# Altium PCB xl6009_kian_v1_TEST1.PcbDoc
Units mm, origin at the board's own origin, x right, y up, seen from the top; angles counter-clockwise.
Board outline 49.02 x 80.01 mm, 2 copper layers (Top Layer, Bottom Layer); 32 components, 16 nets, 98 pads, 0 vias.
Unrouted connection lines stored in the file: 1.
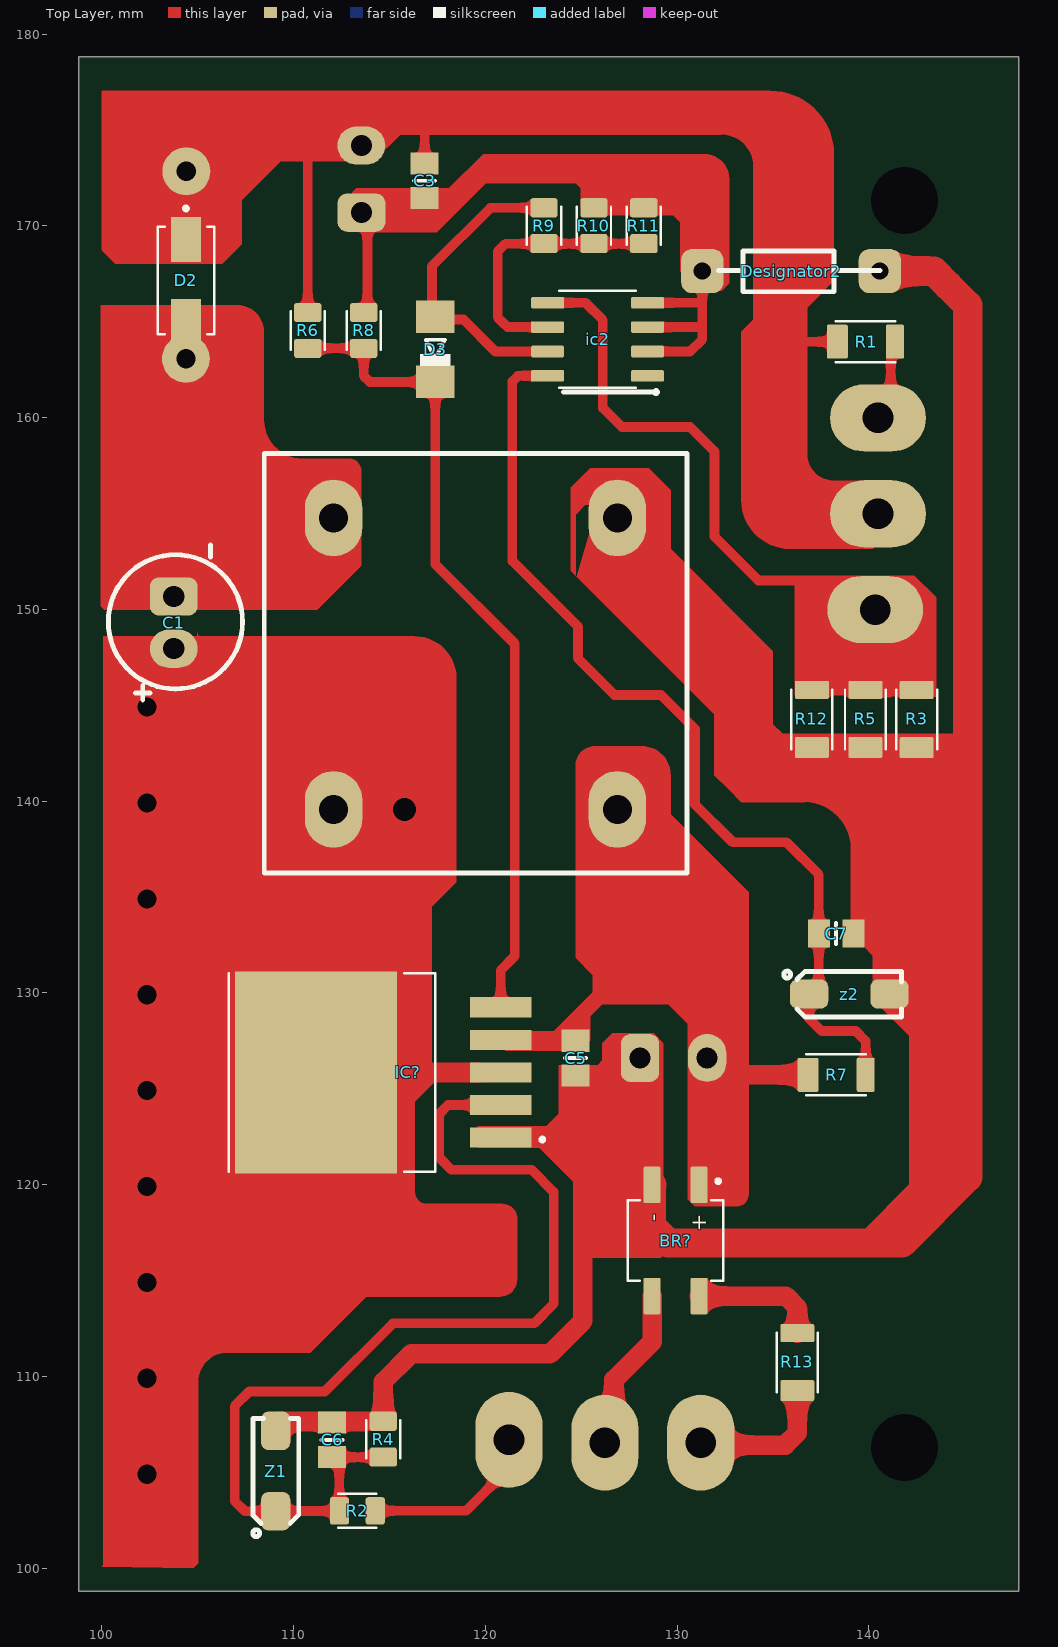
[diagram p0: Top Layer view]
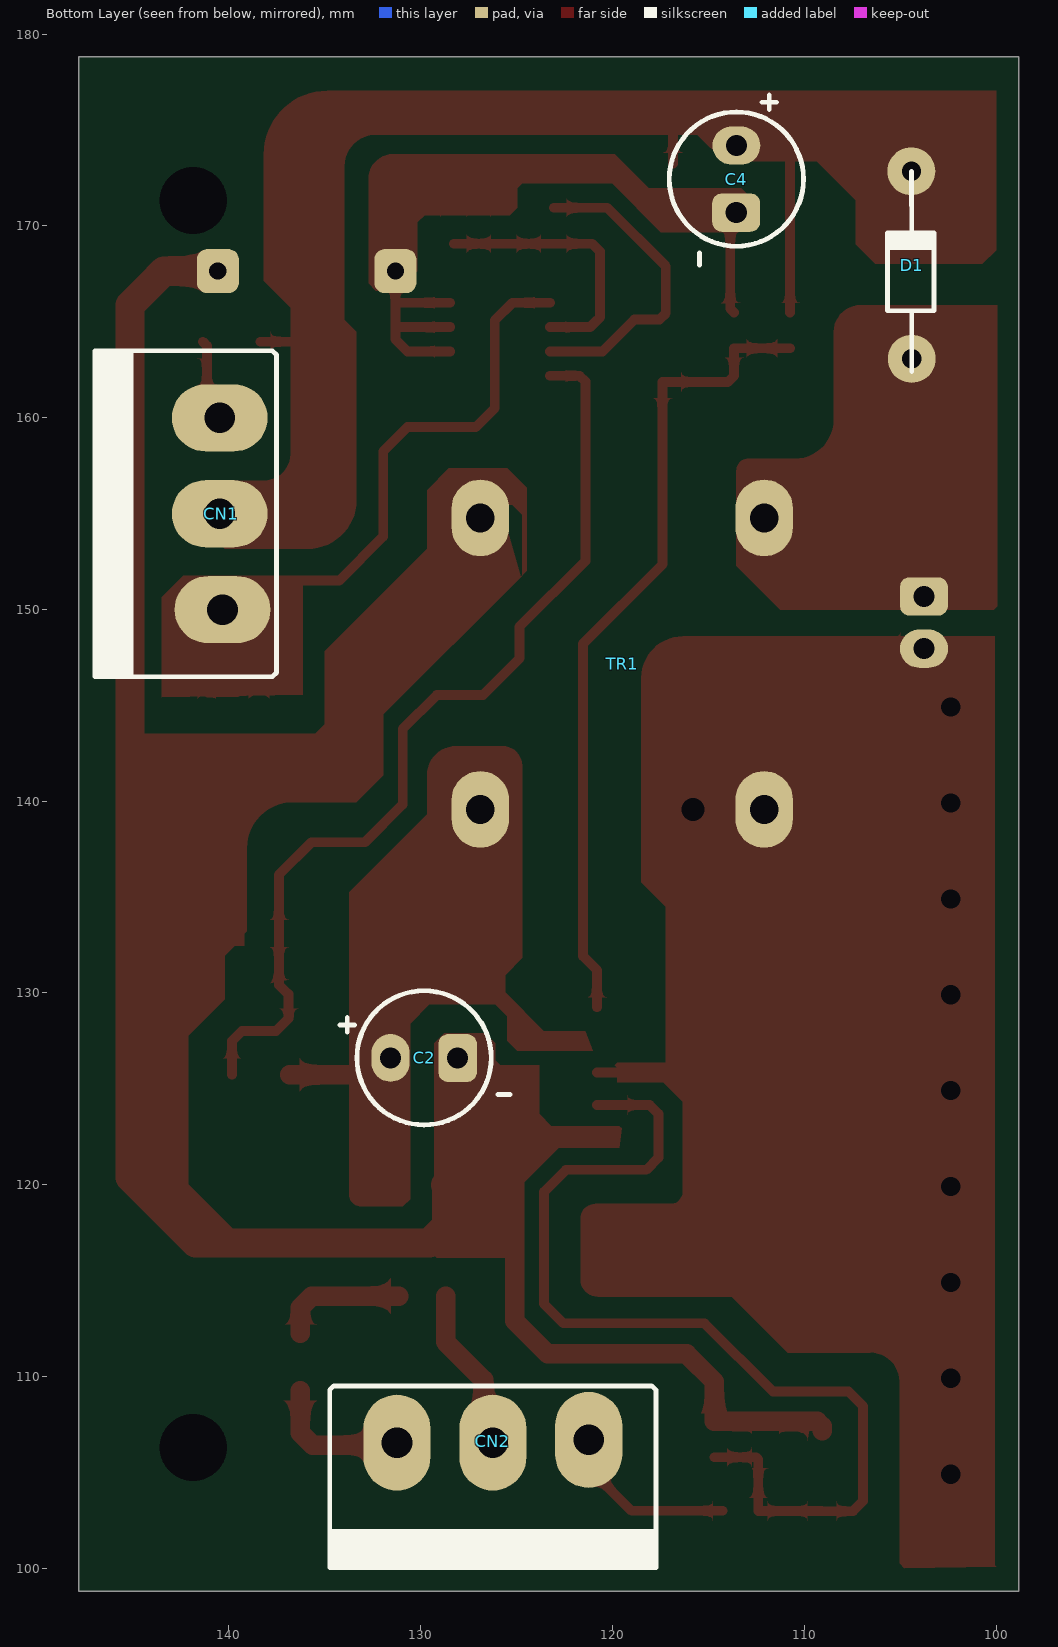
[diagram p1: Bottom Layer view, seen from below]
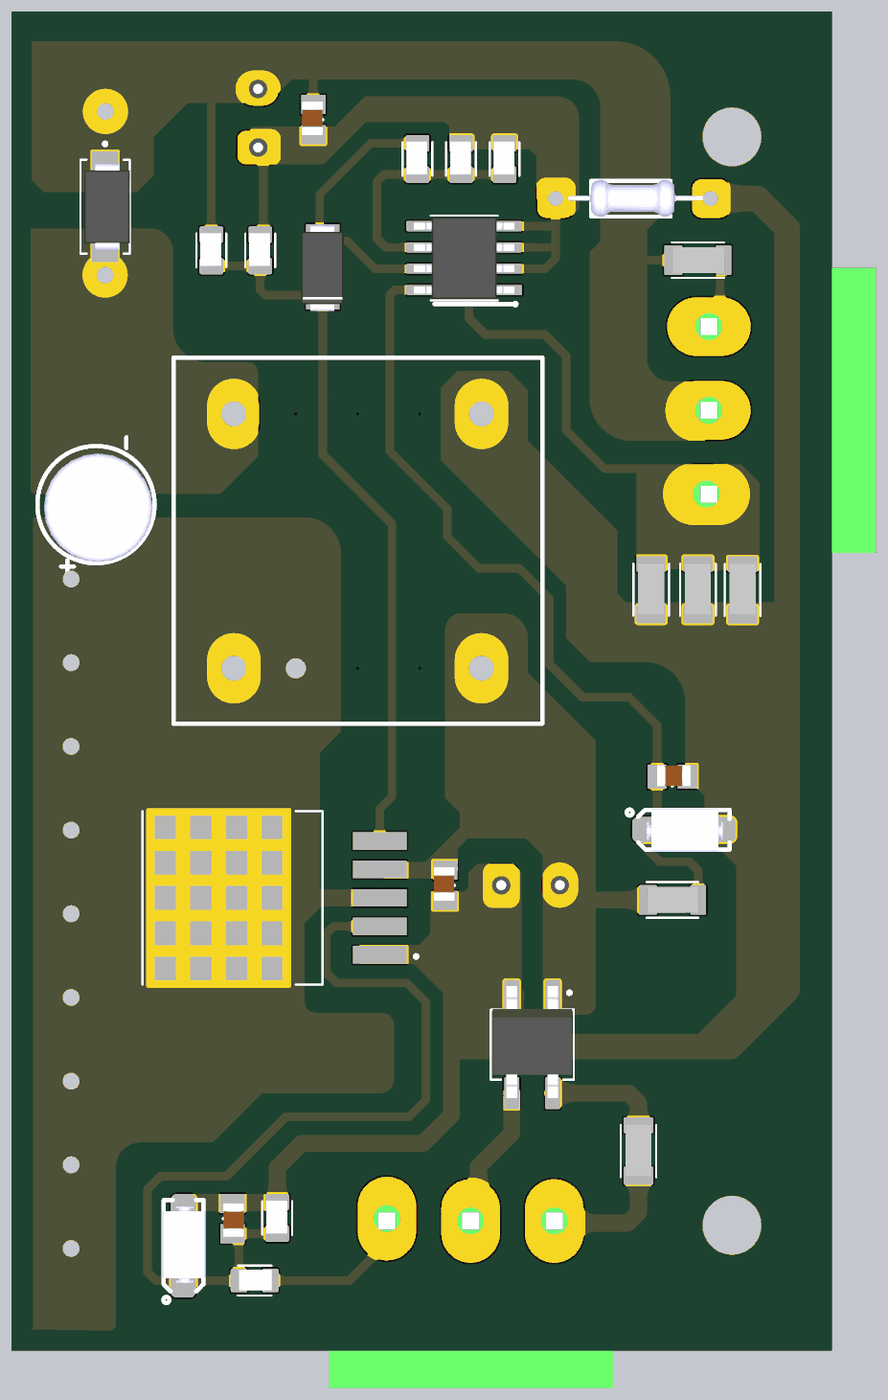
[diagram p2: 3D render of the assembled board from above, using the file's embedded part models]
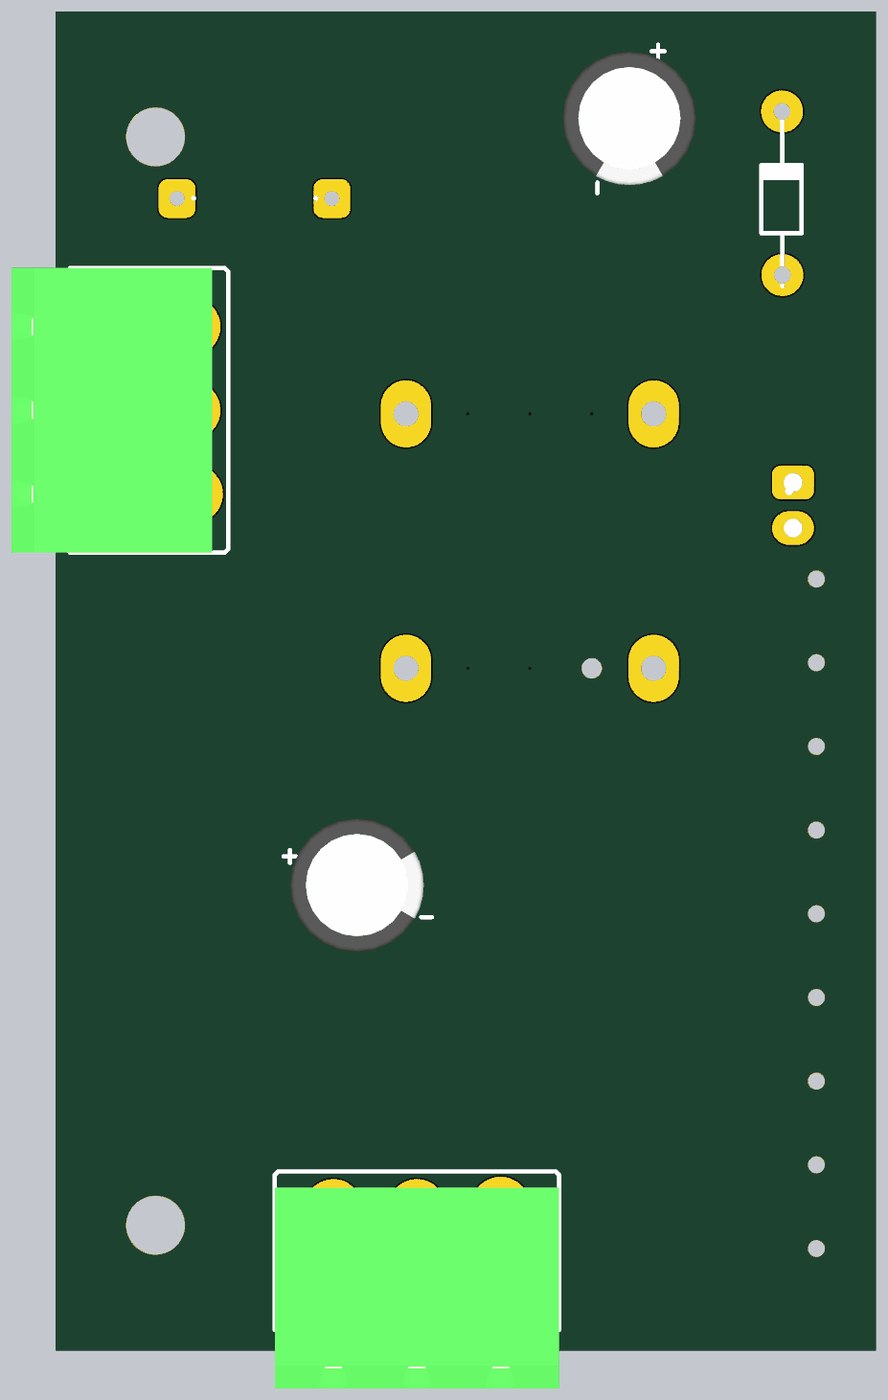
[diagram p3: 3D render of the assembled board from below, using the file's embedded part models]

## Layer stack, top to bottom
Top Solder: solder mask 0.0102, Solder Resist, Dk 3.5
Top Layer: signal copper 0.0356
Dielectric 1: dielectric 0.32, FR-4, Dk 4.8
Bottom Layer: signal copper 0.0356
Bottom Solder: solder mask 0.0102, Solder Resist, Dk 3.5

## Board outline
98.806,98.806 98.806,178.816 147.828,178.816 147.828,98.806

## Design rules (kind name [scope] priority, off if disabled: settings)
Clearance "Stitching GND" [IsStitchingVia and InNet('GND') vs (IsVia and (Not IsStitchingVia)) Or IsPad] p1: gap=0.127 ignorepadtopadclearanceinfootprint=FALSE
Clearance [All] p2: gap=0.432 ignorepadtopadclearanceinfootprint=FALSE
PolygonConnect [All] p1: connectstyle=Relief reliefconductorwidth=0.254 reliefentries=4 polygonreliefangle="90 Angle" airgapwidth=0.254
RoutingVias [All] p1: holewidth=0.711 width=1.27 viastyle="Through Hole" minholewidth=0.711 minwidth=1.27 maxholewidth=0.711 maxwidth=1.27
SolderMaskExpansion [All] p1: expansion=0.102 istentingtop=FALSE
Width [All] p1: maxlimit=5 minlimit=0.254 preferedwidth=0.254 minimp=50.000000 maximp=50.000000 favimp=50.000000
30 further rules are at their usual default settings.

## Classes and differential pairs
net class POWER_OUT: +LED_G +LED_OUT -LED_OUT
net class HV: AC1 AC2 SIGNAL-24V
component class U_xl6009_kian_v1_SWITCHING: BR? C1 C2 C3 C4 C5 C6 C7 D1 D2 D3 ic2 IC? R1 R2 R3 R4 R5 R6 R7 R8 R9 R10 R11 TR1 Z1 z2
component class U_xl6009_kian_v1_CONECTOR: CN1 CN2

## Components (designator, comment, footprint, x,y, rotation, side; value= is the part's Value field where it differs from the comment)
BR? "MB6S" MB6S/SMD 129.286,117.094 r90 top
C1 "22uF-50V" cap/330u/16v 103.759,150.675 r270 top
C2 "330uF-50V" CAP-EL-P3.5MM 128.072,126.619 r0 bottom
C3 "1uF" CAP-0805 116.862,173.275 r270 top
C4 "330uF-50V" CAP-EL-P3.5MM 113.538,170.688 r90 bottom
C5 "1uF" CAP-0805 124.736,127.533 r270 top
C6 "100nF" CAP-0805 111.992,105.769 r90 top
C7 "100nF" CAP-0805 139.217,133.074 r180 top
CN1 "LED_OUT" CONECTOR/FONIX/3PIN 140.479,159.987 r270 bottom
CN2 "INPUT-24-S" CONECTOR/FONIX/3PIN 131.238,106.553 r180 bottom
D1 "1N5822" DIOD/1N4007/DIP 104.394,172.868 r270 bottom
D2 "1N5822" DIOD/1N4007/SMD 104.394,169.31 r270 top
D3 "4148" mini_melf 117.348,163.703 r90 top
Designator2 "Comment" RES/0.25W 131.318,167.64 r0 top
ic2 "LM358" SOP-8 125.476,164.211 r180 top
IC? "XL6009" TO-263-5L 114.681,125.857 r180 top
R1 "33R" RES/1206 139.827,163.83 r0 top
R2 "10K" RES/0805 114.378,103.93 r180 top
R3 "0.2R" RES/1206 142.625,144.26 r90 top
R4 "100K" RES/0805 113.748,107.782 r270 top
R5 "0.2R" RES/1206 139.954,144.272 r90 top
R6 "10K" RES/0805 109.811,165.594 r270 top
R7 "2.2k" RES/1206 138.303,125.603 r0 top
R8 "2.2K" RES/0805 112.732,165.594 r270 top
R9 "10K" RES/0805 122.13,171.055 r270 top
R10 "2.2k" RES/0805 124.733,171.055 r270 top
R11 "" RES/0805 127.337,171.055 r270 top
R12 "0.2R" RES/1206 137.16,144.272 r90 top (schematic designator R3)
R13 "0.2R" RES/1206 136.402,110.732 r90 top (schematic designator R3)
TR1 "EE20" EE20- 126.889,139.576 r180 bottom
Z1 "4.7V" DIOD/RS1J 108.966,105.156 r90 top
z2 "12v" DIOD/RS1J 139.065,130.048 r0 top

## Footprints (in the part's own frame and the unit in brackets; to place one, negate y for a bottom-side part, rotate by r counter-clockwise, add the part's x,y. Pads: shape width x height; smd on the part's side, far side on the other; paste and mask are expansions set on the pad)
CAP-0805 [mm]
  rect 1.15x1.45 smd: 1(0.025,-0.022) 2(1.825,-0.022)
  silkscreen extent 0.93,-0.57 0.93,0.53, body extent -0.17,-0.71 1.84,0.54, height 0.94
CAP-EL-P3.5MM [mm]
  oval 2x2.5 hole 1.1: +(3.5,0)
  rrect50% 2x2.5 hole 1.1: -(0,0.01)
  silkscreen extent -2.73,-3.5 6.13,3.5, body extent -2.25,-4 5.75,4, height 11.5
cap/330u/16v [mm]
  oval 2x2.5 hole 1.1: +(2.72,0)
  rrect50% 2x2.5 hole 1.1: -(0,0)
  silkscreen extent -2.7,-3.41 5.4,3.59, body extent -1.74,-3.02 4.76,3.48, height 11
CONECTOR/FONIX/3PIN [mm]
  oval 3.5x5 hole 1.6: 1(0,0) 2(5,0) 3(10,0.144)
  silkscreen extent -3.5,-6.5 13.5,2.96, body extent -3.5,-10 13.5,2, height 8.8
DIOD/1N4007/DIP [mm]
  round 2.5 hole 1: A(9.8,0) K(0.025,-0.021)
  silkscreen extent 0.02,-1.26 10.46,1.15
DIOD/1N4007/SMD [mm]
  rect 2.33x1.56 smd: A(4.299,0) K(0.019,0)
  silkscreen extent -1.7,-1.48 4.96,1.48, body extent -0.44,-1.24 4.76,1.49, height 2.6
DIOD/RS1J [mm]
  rrect50% 2x1.524 smd: A(2.013,-0.106) K(-2.178,-0.106)
  silkscreen extent -3.5,-1.31 2.65,1.09, body extent -2.32,-1.44 2.28,1.16, height 2.1
EE20- [mm]
  oval 3x4 hole 1.5: 1(-0.001,-0.003) 5(14.799,-0.003) 6(-0.001,15.197) 10(14.799,15.197)
  round 0 all layers, no hole: 2(3.699,-0.003) 3(7.399,-0.003) 7(3.699,15.197) 8(7.399,15.197) 9(11.099,15.197)
  round 0 hole 1.2: 4(11.099,-0.003)
MB6S/SMD [mm]
  rrect23% 1.91x0.91 smd: +(2.9,-1.86) -(2.9,0.59) F(-2.9,0.59) N(-2.9,-1.86)
  silkscreen extent -2.1,-3.12 3.2,1.85, body extent -3.19,-3 3.51,1.72, height 2.9
mini_melf [mm]
  rect 1.7x2 smd: A(1.557,-0.049) K(-1.843,-0.049)
  silkscreen extent -1.01,-0.84 0.36,0.74, body extent -2.79,-1.31 2.35,1.25, height 2.5
RES/0.25W [mm]
  rrect50% 2.2x2.3 hole 0.9: 1(0,0) 2(9.258,0)
  silkscreen extent 0.85,-1.07 9.26,1.05, body extent 0.81,-1.08 8.41,1.12, height 2.1
RES/0805 [mm]
  rrect25% 1x1.42 smd: 1(0.113,0.933) 2(1.983,0.933)
  silkscreen extent 0.05,0.04 2.05,1.82, body extent 0,0.28 2,1.53, height 0.6
RES/1206 [mm]
  rrect14% 1.09x1.77 smd: 1(-1.469,0.131)
  rrect14% 0.94x1.77 smd: 2(1.536,0.131)
  silkscreen extent -1.55,-0.93 1.55,1.2, body extent -1.51,-0.64 1.59,0.91, height 0.55
SOP-8 [mm]
  rrect25% 1.71x0.61 smd: 1(-2.986,2.032) 2(-2.986,0.762) 3(-2.986,-0.508) 4(-2.986,-1.778) 5(2.224,-1.778) 6(2.224,-0.508) 7(2.224,0.762) 8(2.224,2.032)
  silkscreen extent -3.53,-2.4 1.62,2.98, body extent -3.38,-2.32 2.62,2.58, height 1.75
TO-263-5L [mm]
  rect 3.21x1.05 smd: 1(-6.13,3.4) 2(-6.13,1.7) 3(-6.13,0) 4(-6.13,-1.7) 5(-6.13,-3.4)
  rect 8.46x10.53 smd paste-6: 6(3.5,0)
  silkscreen extent -8.4,-5.18 8.05,5.18

## Part data
BR?: library part "BRIDGE RECTIFIERS/SMD"
C1 C2 C4: library part cap-electrolit
C3 C5 C6 C7: library part cap_smd
CN1 CN2: library part CONECTOR/FONIX/3PIN
D1 D2 D3: library part DIOD/RECTIFIERS
R1 R2 R3 R4 R5 R6 R7 R8 R9 R10 R11 R12 R13: library part RES/SMD
TR1: library part TRANS_NORMAL
Z1 z2: library part zener-0.5w

## Free pads (board coordinates)
  round 1.524 hole 3.5: 13(141.859,106.299) 13(141.859,171.323)
  oval 0x1.524 hole 1: 14(102.362,144.907) 34(102.362,144.907) 35(102.362,139.907) 36(102.362,134.907) 37(102.362,129.907) 38(102.362,124.907) 39(102.362,119.907) 40(102.362,114.907) 41(102.362,109.907) 42(102.362,104.907)

## Nets (pads, with @x,y where several pads share a name; then routed paths per layer and width w, separated by ;. In a path a pad name is that pad's centre, name@x,y a point inside that pad or via, vN(x,y) a via of type N, cw(c..) or ccw(c..) an arc to the next point about the centre after c; other vN are vias at no path point)
+12: C7.2 ic2.8 R7.2 z2.K | length 50.2
  Top Layer w0.508: ic2.8 121.71,162.179 121.412,161.881 121.412,152.527 124.841,149.098 124.841,147.447 126.746,145.542 129.159,145.542 130.937,143.764 130.937,139.827 132.905,137.858 135.7,137.858 137.392,136.166 C7.2 137.392,130.419 z2.K@136.916,129.942 ; z2.K 136.887,128.67 137.541,128.016 139.319,128.016 139.839,127.496 R7.2
+24: BR?.+ C2.+ C5.1 IC?.4 R7.1 TR1.1 | length 5.6
  Top Layer w1.016: C2.+ 131.588,126.619 132.474,125.734 R7.1
+LED_G: CN1.1 R1.2 | length 4.3
  Top Layer w0.508: CN1.1 141.147,160.655 141.147,163.745 R1.2
+LED_OUT: C3.1 C4.+ CN1.2 D1.K D2.K R1.1 R6.1 | length 14.6
  Top Layer w0.508: R6.1 110.744,174.625 110.998,174.879 ; 116.586,175.641 116.84,175.387 C3.1 ; 135.763,163.83 135.894,163.961 R1.1
-LED_OUT: CN1.3 ic2.5 R3.2 R5.2 R12.2 | length 40.9
  Top Layer w0.508: ic2.5 125.222,165.989 126.133,165.078 126.133,160.506 127.127,159.512 130.683,159.512 131.953,158.242 131.953,153.797 134.239,151.511 137.251,151.511 138.775,149.987 CN1.3 140.335,146.024 140.119,145.808 R5.2 ; R12.2 137.035,145.802 R5.2@139.7,145.802 ; R5.2@139.844,145.946 R5.2@139.7,145.802 ; 141.097,145.669 141.091,145.675 139.573,145.675 R5.2@139.7,145.802 ; R3.2 142.488,145.802 R5.2@139.7,145.802
AC1: CN2.1 R13.1 | length 7.6
  Top Layer w1.016: CN2.1 131.365,106.426 135.636,106.426 136.271,107.061 R13.1
AC2: BR?.F CN2.2 | length 8.7
  Top Layer w1.016: CN2.2 126.713,107.028 126.713,109.822 128.696,111.805 BR?.F
EN: C6.1 IC?.2 R2.2 R4.2 Z1.K | length 52.7
  Top Layer w0.508: R4.2 114.678,105.796 112.522,105.796 112.395,105.669 R2.2 112.385,102.987 109.081,102.987 Z1.K 107.461,102.978 106.934,103.505 106.934,108.458 107.696,109.22 111.633,109.22 115.189,112.776 122.555,112.776 123.571,113.792 123.571,119.634 122.428,120.777 118.237,120.777 117.602,121.412 117.602,123.698 118.061,124.157 IC?.2
FB: D3.K IC?.5 R6.2 R8.2 | length 42.8
  Top Layer w0.508: R6.2 R8.2 113.665,162.179 113.984,161.86 D3.K 117.397,152.351 121.539,148.209 121.539,131.919 120.811,131.191 IC?.5
FUZE: BR?.N R13.2 | length 6.7
  Top Layer w1.016: BR?.N 135.676,114.194 136.271,113.599 R13.2
GND: BR?.- C2.- C3.2 C4.- C5.2 C6.2 C7.1 Designator2.1 Designator2.2 ic2.2 ic2.3 ic2.4 IC?.1 R3.1 R4.1 R5.1 R8.1 R10.1 R11.1 R12.1 TR1.6 Z1.A z2.A | length 159.4
  Top Layer w0.508: C4.- 116.586,170.688 C3.2@117.348,171.45 ; R8.1 113.855,165.671 113.855,170.37 C4.-@114.046,170.561 ; C3.2 C3.2@117.348,171.45 ; R10.1 R11.1@128.135,170.942 ; ic2.2 130.683,163.449 131.318,164.084 131.318,164.846 ; ic2.3 131.191,164.719 131.318,164.846 ; ic2.4 131.191,165.989 131.318,166.116 ; Designator2.1@131.064,167.64 131.064,170.561 130.683,170.942 R11.1 R11.1@128.135,170.942 ; Designator2.1 131.318,166.116 ; C3.2@117.348,171.45 118.491,171.45 120.015,172.974 127.127,172.974 127.889,172.212 127.889,171.188 R11.1@128.135,170.942 ; 131.318,164.846 131.318,166.116
  Top Layer w1.016: Z1.A 109.072,107.407 109.334,107.669 R4.1 114.681,109.728 116.136,111.183 123.375,111.183 125.095,112.903 125.095,122.203 124.841,122.457 ; IC?.1 124.841,122.457 ; C2.- 127.889,126.426 127.889,124.333 128.696,123.526 128.696,122.555 ; BR?.- 128.696,122.555 ; 124.841,122.457 128.598,122.457 128.696,122.555
  Top Layer w1.524: BR?.- 128.651,119.949 128.651,117.86 129.544,116.967 141.732,116.967 145.161,120.396 145.161,130.048 ; Designator2.2 143.383,167.64 144.144,166.879 145.161,165.862 145.161,130.048 ; 145.055,129.942 145.161,130.048
NetC1_-: C1.- D1.A D2.A TR1.10 | length 22.1
  Top Layer w1.524: C1.-@103.886,151.003 104.136,151.003 104.394,151.261 104.394,154.94 ; D2.A D1.A 104.394,154.94 ; TR1.10 111.923,154.94 104.394,154.94
NetD3_A: D3.A ic2.7 R9.1 | length 16.4
  Top Layer w0.508: R9.1 120.269,170.942 117.221,167.894 117.221,165.436 117.546,165.111 118.861,165.111 120.523,163.449 ic2.7
Netic2_6: ic2.6 R9.2 R10.2 R11.2 | length 14
  Top Layer w0.508: ic2.6 121.158,164.719 120.905,164.972 120.65,165.227 120.65,168.656 121.066,169.072 R9.2 R10.2 R11.2
SIGNAL-24V: CN2.3 R2.1 | length 9.4
  Top Layer w0.508: R2.1 118.999,102.997 121.238,105.236 CN2.3
SW: C1.+ IC?.3 IC?.6 pad.14 pad.34 pad.35 pad.36 pad.37 pad.38 pad.39 pad.40 pad.41 pad.42 TR1.4 TR1.5 | length 40.3
  Top Layer w0.508: C1.+ C1.+@103.886,148.082 ; C1.+@103.886,148.283 110.289,148.283 112.09,146.482 TR1.5 ; TR1.5@112.488,139.573 112.615,139.7 112.615,138.869 111.181,137.435 IC?.6 IC?.3
pads on no net: ic2.1 TR1.2 TR1.3 TR1.7 TR1.8 TR1.9

## Other copper
Top Layer:
  region net GND: 113.538,169.672 117.475,169.672 120.015,172.212 124.714,172.212 124.968,171.958 124.968,170.942 125.349,170.561 129.794,170.561 130.175,170.18 130.175,167.64 131.191,166.624 132.334,166.624 132.715,167.005 132.715,172.466 ccw(c131.445,172.466) 131.445,173.736 119.888,173.736 118.11,171.958 113.284,171.958 112.903,171.577
  region net -LED_OUT: 136.144,145.542 136.144,151.384 136.525,151.765 142.367,151.765 143.51,150.622 143.51,145.415
  region net GND: 139.7,117.602 142.113,120.015 142.113,127.762 140.208,129.667 140.208,131.953 139.7,132.461 139.192,132.461 139.192,133.096 139.065,133.223 139.065,137.541 ccw(c136.652,137.541) 136.652,139.954 133.35,139.954 132.715,140.589 133.223,141.097 133.223,142.367 144.653,142.367 145.542,141.478 145.542,120.65 141.851,116.959 139.683,117.113 cw(c139.7,117.357)
  region net NetC1_-: 113.538,152.273 111.252,149.987 100.127,149.987 99.949,150.165 99.949,165.862 107.061,165.862 cw(c107.061,164.465) 108.458,164.465 108.458,159.893 ccw(c110.49,159.893) 110.49,157.861 112.903,157.861 cw(c112.903,157.226) 113.538,157.226 113.538,154.813
  region net +LED_OUT: 100.711,168.021 100,168.732 100,177.038 134.874,177.038 cw(c134.874,173.736) 138.176,173.736 138.176,167.132 136.779,165.735 136.779,158.115 ccw(c138.176,158.115) 138.176,156.718 141.224,156.718 141.986,155.956 141.732,155.702 141.732,154.305 141.351,154.305 140.208,153.162 135.89,153.162 cw(c135.89,155.702) 133.35,155.702 133.35,164.465 133.985,165.1 133.985,173.101 ccw(c132.334,173.101) 132.334,174.752 115.57,174.752 114.173,173.355 109.347,173.355 107.315,171.323 107.315,169.037 106.299,168.021
  region net +24: 121.031,127 124.968,127 125.476,127.508 125.476,128.778 126.111,129.413 129.54,129.413 130.556,128.397 130.556,119.253 130.937,118.872 133.096,118.872 ccw(c133.096,119.507) 133.731,119.507 133.731,135.255 129.667,139.319 129.667,141.351 ccw(c128.143,141.351) 128.143,142.875 125.73,142.875 ccw(c125.73,141.859) 124.714,141.859 124.714,131.826 125.603,130.937 125.603,130.048 123.571,128.016 121.412,128.016
  region net GND: 119.507,122.936 119.634,123.063 123.19,123.063 123.825,123.698 123.825,126.238 125.857,126.238 126.111,126.492 126.111,127.381 126.619,127.889 128.778,127.889 129.286,127.381 129.286,116.332 129.159,116.205 125.095,116.205 124.714,116.586 124.714,120.015 122.809,121.92 119.634,121.92
  region net SW: 104.775,100 105.029,100.254 105.029,109.728 cw(c106.553,109.728) 106.553,111.252 110.871,111.252 113.792,114.173 120.777,114.173 ccw(c120.777,115.062) 121.666,115.062 121.666,118.237 ccw(c120.904,118.237) 120.904,118.999 116.967,118.999 cw(c116.967,119.634) 116.332,119.634 116.332,124.333 117.348,125.349 119.761,125.349 119.761,126.111 119.888,126.238 119.761,126.365 118.618,126.365 117.221,126.365 117.221,134.493 118.491,135.763 118.491,146.431 ccw(c116.332,146.431) 116.332,148.59 101.727,148.59 100.076,148.59 100.076,146.939 100.076,100.152 100,100.076
  region net GND: 125.857,155.448 125.222,155.448 124.714,154.94 124.714,151.765 131.953,144.526 131.953,141.351 132.715,140.589 144.526,140.589 145.161,139.954 145.796,140.589 145.796,142.494 144.78,143.51 135.509,143.51 135.001,144.018 135.001,147.828 129.667,153.162 129.667,156.21 128.524,157.353 125.476,157.353 124.46,156.337 124.46,152.019 124.785,151.694

## Silkscreen, mask and mechanical layers (free items; w line width, h text height)
Mechanical 1:
  lines w0.254: 147.828,98.806 147.828,98.806 ; 147.828,98.806 98.806,98.806 98.806,178.816 147.828,178.816 147.828,98.806

## Text inside footprints (layer, text, board x,y; h text height)
BR?: Top Overlay "+" at 130.811,118.493 h0.81 r270; Top Overlay "-" at 128.521,118.494 h0.81 r270